# Altium PCB L50T-MAUe.PcbDoc (part 1 of 2)
Units mm, origin at the board's own origin, x right, y up, seen from the top; angles counter-clockwise.
Board outline 170.25 x 235.25 mm, 2 copper layers (Top Layer, Bottom Layer); 116 components, 84 nets, 377 pads, 326 vias.
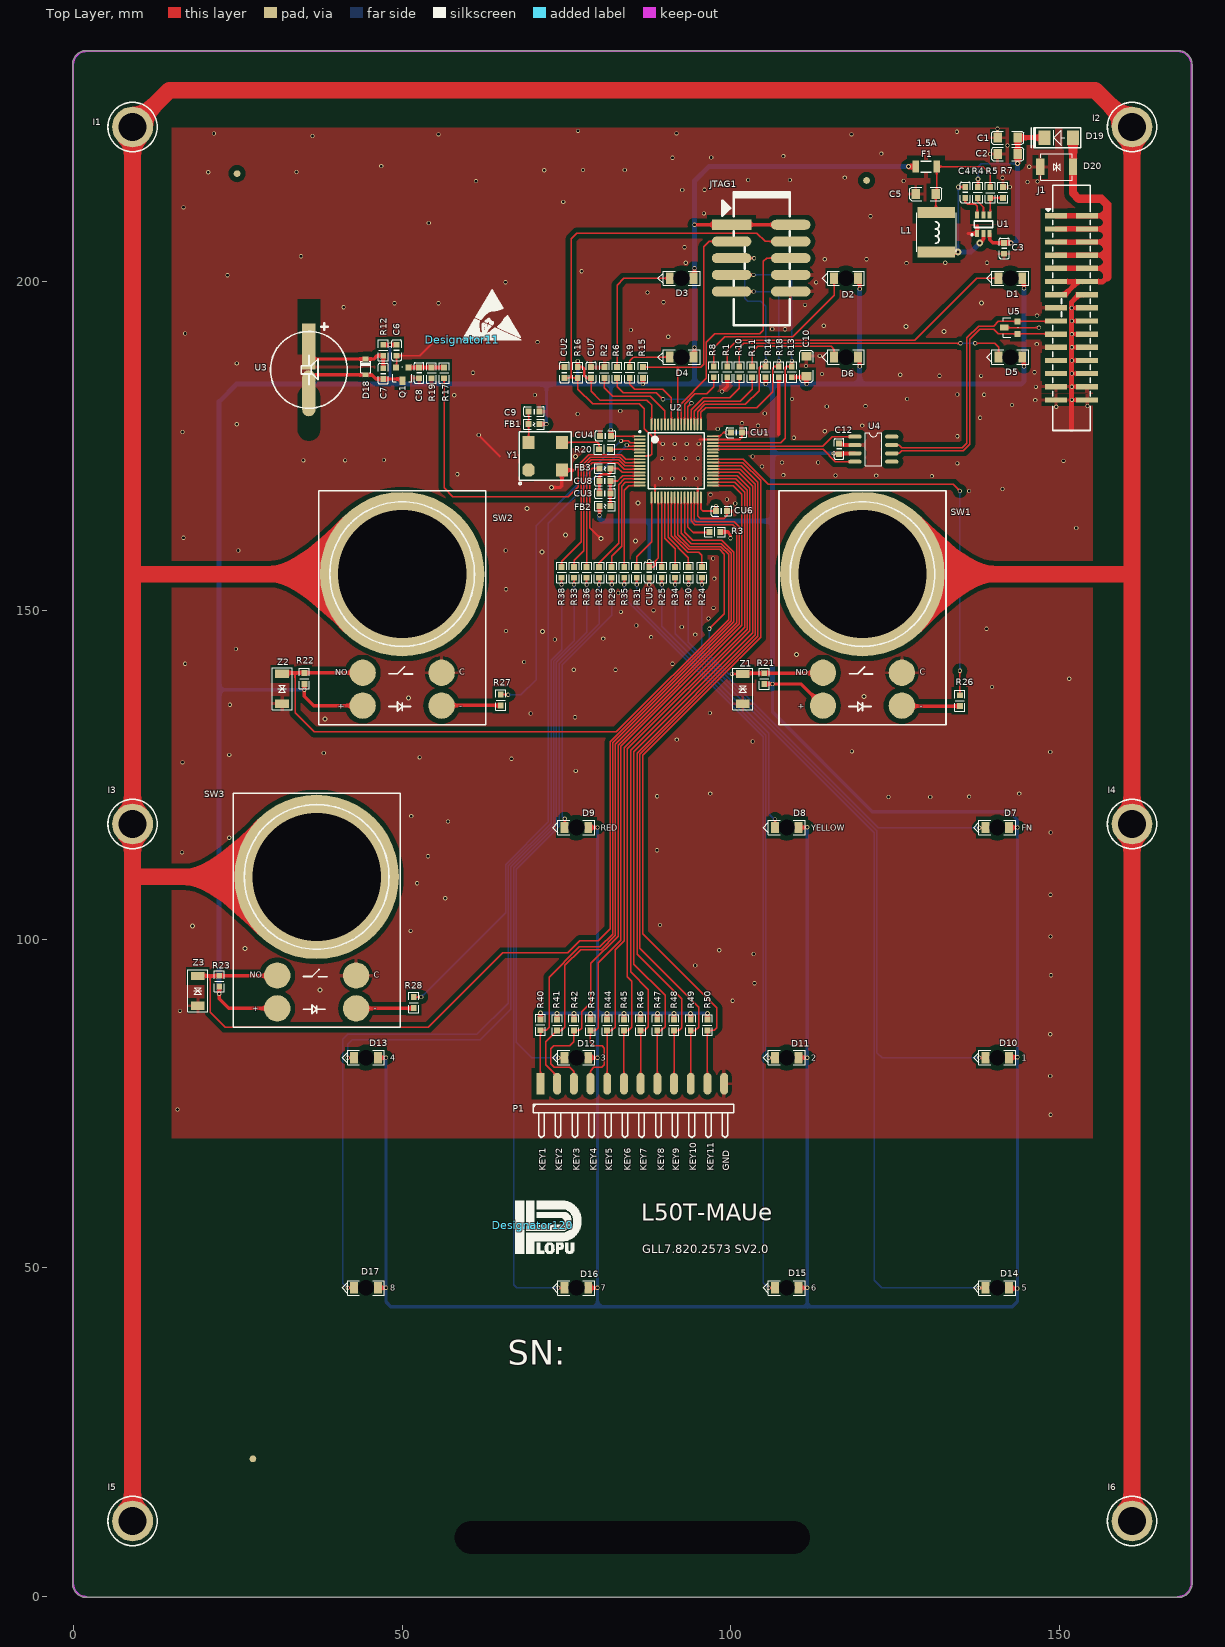
[diagram p0: Top Layer view]
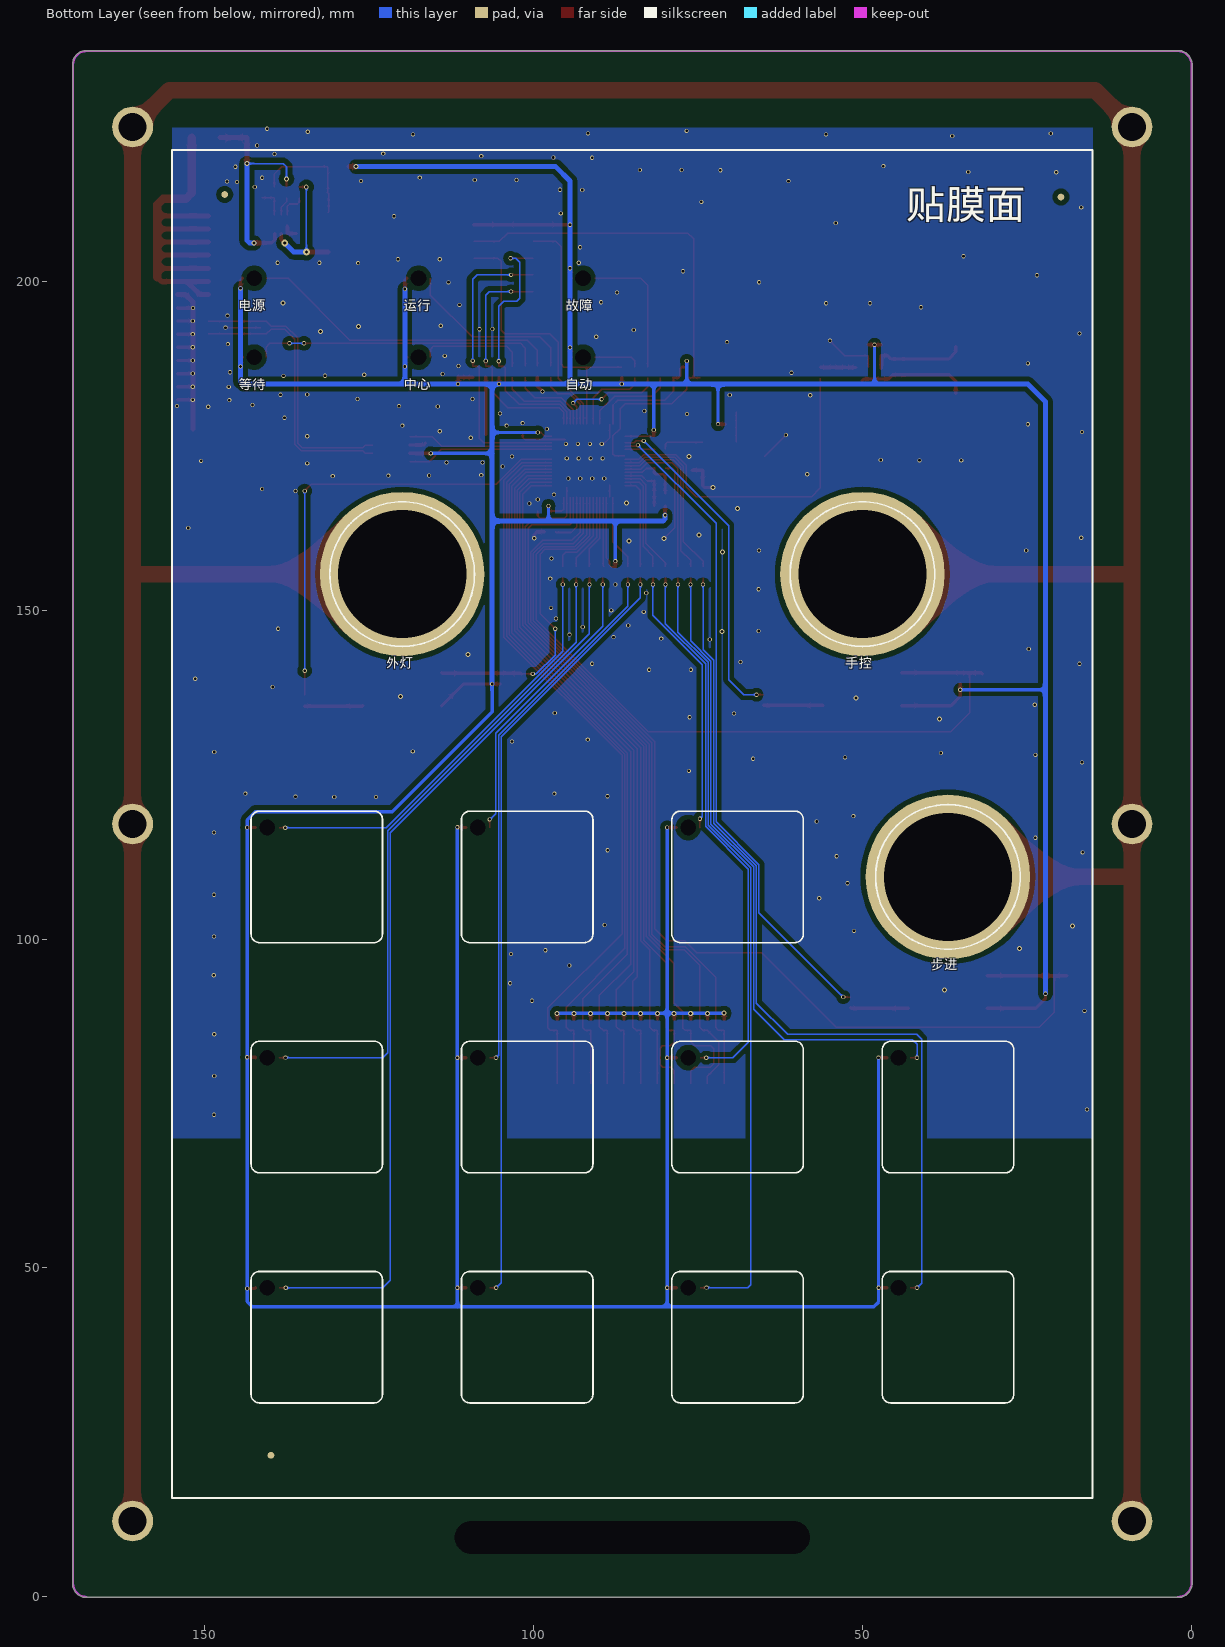
[diagram p1: Bottom Layer view, seen from below]

## Layer stack, top to bottom
Top Solder: solder mask 0.0102, Solder Resist, Dk 3.5
Top Layer: signal copper 0.0356
Dielectric1: dielectric 0.32, FR-4, Dk 4.8
Bottom Layer: signal copper 0.0356
Bottom Solder: solder mask 0.0102, Solder Resist, Dk 3.5

## Board outline
-0.127,2 ccw(c2,2) 2,-0.127 168,-0.127 ccw(c168,2) 170.127,2 170.127,233 ccw(c170,233) 170.127,233.001 cw(c168,233) 170.127,233 cw(c170,233) 170.127,233 170.127,233.001 ccw(c168,233) 168,235.127 2,235.127 ccw(c2,233) -0.127,233

## Design rules (kind name [scope] priority, off if disabled: settings)
Clearance Clearance_poly [InPolygon] p1: gap=0.762
Clearance Clearance_LED [InComponent('D1','D2','D3','D4','D5','D6','D7','D8','D9',10,'D11','D12',13,'D14','D15','D16','D17')] p2: gap=-0.254
Clearance Clearance_U2 [InComponent('U2')] p3: gap=0.178
Clearance Clearance_U3 [InComponent('U3')] p4: gap=0.178
Clearance [All] p5: gap=0.203
ComponentClearance [All] p1: gap=0.152 collisioncheckmode=3 verticalgap=0.152 showdistances=FALSE
DiffPairsRouting [All] p1: maxlimit=0.254 minlimit=0.254 mostfreqgap=0.254 toplayer_minwidth=0.203 toplayer_maxwidth=0.381 toplayer_prefwidth=0.381 bottomlayer_minwidth=0.203 bottomlayer_maxwidth=0.381 bottomlayer_prefwidth=0.381 maxuncoupledlength=12.7
HoleSize [All] p1: absolutevalues=TRUE maxlimit=76.2 minlimit=0.025 maxpercent=80.000 minpercent=20.000
HoleToHoleClearance [All] p1: gap=0.152 allowstackedmicrovias=TRUE
MinimumSolderMaskSliver [All] p1: minsoldermaskwidth=0
PlaneConnect [InNet('V3.3')] p1: planeconnectstyle=Direct reliefexpansion=0.508 reliefentries=4 reliefconductorwidth=0.254 reliefairgap=0.254
PlaneConnect PlaneConnect_DGND [All] p2: planeconnectstyle=Relief reliefexpansion=0.508 reliefentries=4 reliefconductorwidth=0.508 reliefairgap=0.508
PolygonConnect PolygonConnect_via [isvia] p1: connectstyle=Direct reliefconductorwidth=0.254 reliefentries=4 polygonreliefangle="90 Angle" airgapwidth=0.254
PolygonConnect [All] p2: connectstyle=Relief reliefconductorwidth=0.508 reliefentries=4 polygonreliefangle="90 Angle" airgapwidth=0.508
RoutingVias [All] p1: holewidth=0.711 width=1.27 viastyle="Through Hole" minholewidth=0.406 minwidth=0.635 maxholewidth=0.762 maxwidth=1.524
ShortCircuit ShortCircuit_1 [InComponent('D1','D2','D3','D4','D5','D6','D7','D8','D9','D10','D11','D12','D13','D14','D15','D16','D17')] p1: allowed=TRUE
ShortCircuit [All] p2: allowed=FALSE
SilkToSilkClearance [All] p1 off: silktosilkclearance=0
SilkToSolderMaskClearance [IsPad] p1 off: minsilkscreentomaskgap=0 clearancetoexposedcopper=TRUE
SolderMaskExpansion [All] p1: expansion=0.102
UnpouredPolygon [All] p1 off:
Width [All] p1: maxlimit=10.16 minlimit=0.152 preferedwidth=0.254
20 further rules are at their usual default settings.

## Components (designator, comment, footprint, x,y, rotation, side; value= is the part's Value field where it differs from the comment)
C1 "1206-16V-10UF-X5R-K" 1206C#1 140.564,221.869 r0 top
C2 "1206-16V-10UF-X5R-K" 1206C#2 142.088,219.38 r0 top
C3 "0603-50V-0.1UF-X7R-K" 0603C#1 141.554,205.054 r270 top
C4 "0603-50V-0.1UF-X7R-K" 0603C#1 135.636,213.55 r270 top
C5 "1206-10V-47UF-Y5V-M" 1206C#2 129.642,213.335 r0 top
C6 "0603-50V-0.1UF-X7R-K" 0603C#2 49.149,190.373 r270 top
C7 "0603-50V-0.1UF-X7R-K" 0603C#2 47.117,186.817 r270 top
C8 "0603-50V-0.1UF-X7R-K" 0603C#2 52.578,185.293 r90 top
C9 "0603-50V-1NF-X7R-K" 0603c 69.215,180.213 r0 top
C10 "1206-16V-10UF-X5R-K" 1206C#2 111.481,187.122 r270 top
C12 "0603-50V-0.1UF-X7R-K" 0603C#2 116.459,173.736 r90 top
CU1 "0603-50V-0.1UF-X7R-K" 0603C#2 101.674,177.038 r180 top
CU2 "0603-50V-0.1UF-X7R-K" 0603C#2 74.674,186.995 r270 top
CU3 "0603-50V-0.01UF-X7R-K" 0603C#2 81.661,167.767 r180 top
CU4 "0603-50V-0.1UF-X7R-K" 0603C#2 80.084,176.53 r0 top
CU5 "0603-50V-0.1UF-X7R-K" 0603C#2 87.577,154.94 r90 top
CU6 "0603-50V-0.1UF-X7R-K" 0603C#2 99.388,165.1 r180 top
CU7 "0603-50V-0.1UF-X7R-K" 0603C#2 78.738,186.995 r270 top
CU8 "0603-50V-0.1UF-X7R-K" 0603C#2 81.661,169.672 r180 top
D1 "Red" 1206LED-B 142.5,200.5 r0 top locked
D2 "Blue" 1206LED-B 117.5,200.5 r0 top locked
D3 "Green" 1206LED-B 92.5,200.5 r0 top locked
D4 "Red" 1206LED-B 92.5,188.5 r0 top locked
D5 "Blue" 1206LED-B 142.5,188.5 r0 top locked
D6 "Blue" 1206LED-B 117.5,188.5 r0 top locked
D7 "Blue" LED-KEY 140.5,116.96 r180 bottom locked
D8 "Blue" LED-KEY 108.5,116.96 r180 bottom locked
D9 "Blue" LED-KEY 76.5,116.96 r180 bottom locked
D10 "Blue" LED-KEY 140.5,81.96 r180 bottom locked
D11 "Blue" LED-KEY 108.5,81.96 r180 bottom locked
D12 "Blue" LED-KEY 76.5,81.96 r180 bottom locked
D13 "Blue" LED-KEY 44.5,81.96 r180 bottom locked
D14 "Blue" LED-KEY 140.5,46.96 r180 bottom locked
D15 "Blue" LED-KEY 108.5,46.96 r180 bottom locked
D16 "Blue" LED-KEY 76.5,46.96 r180 bottom locked
D17 "Blue" LED-KEY 44.5,46.96 r180 bottom locked
D18 "1N4148" SOD-323 44.45,188.214 r270 top
D19 "SS14" SMA 149.86,221.869 r180 top
D20 "SMBJ15CA" SMB-TVS#1 147.015,217.424 r0 top
Designator11 "Comment" ESD-9 59.106,191.135 r0 top
Designator120 "Comment" LOPU_LOGO 69.875,56.515 r0 top
F1 "贴片1206/nSMD035（台湾陆海）" 1206F 129.692,217.475 r180 top
FB1 "0603 31@100MHz" 0603L 69.215,178.308 r0 top
FB2 "0603 31@100MHz" 0603L 80.01,165.862 r0 top
FB3 "0603 31@100MHz" 0603L 80.01,171.577 r0 top
I1 "PCB-M3" PADS_M3 9,223.5 r0 top locked
I2 "PCB-M3" PADS_M3 161,223.5 r0 top
I3 "PCB-M3" PADS_M3 9,117.5 r0 top locked
I4 "PCB-M3" PADS_M3 161,117.5 r0 top locked
I5 "PCB-M3" PADS_M3 9,11.5 r0 top locked
I6 "PCB-M3" PADS_M3 161,11.5 r0 top locked
J1 "Header15x2_T" IDC-30-2.0T 151.803,196 r0 top locked
JTAG1 "Header 5X2" IDC-10-SMT 104.597,203.556 r0 top
L1 "贴片6045功率电感 3.3uH 5A" L-6045 131.242,207.493 r180 top
P1 "Header 12H" XPHD101-12-A01 85,78 r0 top locked
Q1 "8050" SOT-23 49.073,186.93 r0 top
R1 "0603-680-1%" 0603R#1 99.441,185.445 r90 top
R2 "0603-10K-1%" 0603R#1 80.77,186.995 r270 top
R3 "0603-10K-1%" 0603R#1 98.372,161.925 r180 top
R4 "0603-10K-1%" 0603R#2 137.541,213.55 r90 top
R5 "0603-33.2K-1%" 0603R#1 139.446,214.376 r270 top
R6 "0603-680-1%" 0603R#1 82.677,185.344 r90 top
R7 "0603-10K-1%" 0603R#2 141.351,213.55 r90 top
R8 "0603-680-1%" 0603R#1 97.384,185.445 r90 top
R9 "0603-680-1%" 0603R#1 84.607,185.344 r90 top
R10 "0603-680-1%" 0603R#1 101.27,185.445 r90 top
R11 "0603-680-1%" 0603R#1 103.226,185.42 r90 top
R12 "0603-0-1%" 0603R#1 47.117,188.722 r90 top
R13 "0603-10K-1%" 0603R#1 109.243,187.094 r270 top
R14 "0603-10K-1%" 0603R#1 105.281,187.094 r270 top
R15 "0603-10K-1%" 0603R#1 86.612,186.995 r270 top
R16 "0603-10K-1%" 0603R#1 76.706,185.344 r90 top
R17 "0603-4.7K-1%" 0603R#1 56.388,185.293 r90 top
R18 "0603-10K-1%" 0603R#1 107.278,185.443 r90 top
R19 "0603-3.3K-1%" 0603R#1 54.483,185.293 r90 top
R20 "0603-22-1%" 0603R#1 81.608,174.498 r180 top
R21 "0603-680-1%" 0603R#1 105.078,140.437 r270 top
R22 "0603-680-1%" 0603R#1 35.126,140.462 r270 top
R23 "0603-680-1%" 0603R#1 22.172,94.412 r270 top
R24 "0603-680-1%" 0603R#1 95.578,156.591 r270 top
R25 "0603-680-1%" 0603R#1 89.482,156.591 r270 top
R26 "0603-680-1%" 0603R#1 134.821,137.084 r270 top
R27 "0603-680-1%" 0603R#1 64.996,137.185 r270 top
R28 "0603-680-1%" 0603R#1 51.763,91.186 r270 top
R29 "0603-680-1%" 0603R#1 81.862,156.591 r270 top
R30 "0603-680-1%" 0603R#1 93.546,156.591 r270 top
R31 "0603-680-1%" 0603R#1 85.672,156.591 r270 top
R32 "0603-680-1%" 0603R#1 79.957,156.591 r270 top
R33 "0603-680-1%" 0603R#1 76.147,156.591 r270 top
R34 "0603-680-1%" 0603R#1 91.514,156.591 r270 top
R35 "0603-680-1%" 0603R#1 83.767,156.591 r270 top
R36 "0603-680-1%" 0603R#1 78.052,156.591 r270 top
R38 "0603-680-1%" 0603R#1 74.242,156.591 r270 top
R40 "0603-10K-1%" 0603R#1 71.03,87.782 r270 top
R41 "0603-10K-1%" 0603R#1 73.571,87.757 r270 top
R42 "0603-10K-1%" 0603R#1 76.111,87.757 r270 top
R43 "0603-10K-1%" 0603R#1 78.638,87.757 r270 top
R44 "0603-10K-1%" 0603R#1 81.179,87.757 r270 top
R45 "0603-10K-1%" 0603R#1 83.719,87.757 r270 top
R46 "0603-10K-1%" 0603R#1 86.26,87.757 r270 top
R47 "0603-10K-1%" 0603R#1 88.8,87.757 r270 top
R48 "0603-10K-1%" 0603R#1 91.341,87.757 r270 top
R49 "0603-10K-1%" 0603R#1 93.882,87.757 r270 top
R50 "0603-10K-1%" 0603R#1 96.422,87.757 r270 top
SW1 "SW-DPST" J-19-471 120,155.5 r180 bottom locked
SW2 "SW-DPST" J-19-471 50,155.5 r180 bottom locked
SW3 "SW-DPST" J-19-471 37,109.46 r180 bottom locked
U1 "TPS563200" TSOT23-6 138.405,208.712 r270 top
U2 "STM32F103R8T6" STM-LQFP64_N 91.694,172.72 r0 top
U3 "BUZZER" "BUZZ-.28/.46 -SMT" 35.814,190.119 r270 top locked
U4 "SN65HVD232" SO-8 124.46,176.403 r180 top
U5 "PESD5V0S2BT" SOT-23 143.586,193.954 r270 top
Y1 "HXO-36A8.00000W" XTAL-C 69.215,171.323 r0 top
Z1 "SMBJ5.0CA" SMB-TVS#2 101.801,138.049 r270 top
Z2 "SMBJ5.0CA" SMB-TVS#2 31.748,138.074 r270 top
Z3 "SMBJ5.0CA" SMB-TVS#2 18.921,92.126 r270 top

## Footprints (in the part's own frame and the unit in brackets; to place one, negate y for a bottom-side part, rotate by r counter-clockwise, add the part's x,y. Pads: shape width x height; smd on the part's side, far side on the other; paste and mask are expansions set on the pad)
0603C#1 [mil]
  rect 35x35 smd: 1(-32.5,0) 2(32.5,0)
  silkscreen extent -62,-29 62,30, body extent -31,-16 32,16, height 12
0603C#2 [mil]
  rect 35x35 smd: 1(0,0) 2(65,0)
  silkscreen extent -29,-29 94,30
0603c [mil]
  rect 35x35 smd: 1(0,0) 2(65,0)
  silkscreen extent -29,-29 94,30
0603L [mil]
  rect 35x35 smd: 1(0,0) 2(65,0)
  silkscreen extent -29,-29 94,30
0603R#1 [mil]
  rect 35x35 smd: 1(0,0) 2(65,0)
  silkscreen extent -29,-30 94,29
0603R#2 [mil]
  rect 35x35 smd: 1(-32.5,0) 2(32.5,0)
  silkscreen extent -62,-29 62,30
1206C#1 [mil]
  rect 50x60 smd: 1(0,0) 2(120,0)
  silkscreen extent -35,-40 155,40
1206C#2 [mil]
  rect 50x60 smd: 1(-60,0) 2(60,0)
  silkscreen extent -95,-40 95,40
1206F [mm]
  rect 1x1.85 smd: 1(-1.6,0) 2(1.6,0)
  silkscreen extent -0.8,-0.82 0.8,0.82, body extent -1.75,-0.9 1.75,0.9, height 0.9
1206LED-B [mm]
  round 0 hole 2.4 unplated: 0(0,0)
  rect 1.2x1.7 smd: 1(1.8,0) 2(-1.8,0)
  silkscreen extent -3.61,-1.1 2.8,1.1
"BUZZ-.28/.46 -SMT" [mil]
  rect 275.59x80 smd: 1(0,0)
  oval 275.59x80 smd: 2(280,0)
  silkscreen extent -139,-230 370,230
ESD-9 [mm]
  silkscreen extent 0,0 8.99,7.67
IDC-10-SMT [mm]
  rect 6x1.524 smd: 1(-4.5,5.08)
  oval 6x1.524 smd: 2(4.5,5.08) 3(-4.5,2.54) 4(4.5,2.54) 5(-4.5,0) 6(4.5,0) 7(-4.5,-2.54) 8(4.5,-2.54) 9(-4.5,-5.08) 10(4.5,-5.08)
  silkscreen extent -5.88,-10.21 4.33,10.06
IDC-30-2.0T [mm]
  rect 3.365x0.8 smd: 1(-2.349,14) 2(2.35,14) 3(-2.349,12) 4(2.35,12) 5(-2.349,10) 6(2.35,10) 7(-2.349,8) 8(2.35,8) 9(-2.349,6) 10(2.35,6) 11(-2.349,4) 12(2.35,4) 13(-2.349,2) 14(2.35,2) 15(-2.349,0) 16(2.35,0) 17(-2.349,-2) 18(2.35,-2) 19(-2.349,-4) 20(2.35,-4) 21(-2.349,-6) 22(2.35,-6) 23(-2.349,-8) 24(2.35,-8) 25(-2.349,-10) 26(2.35,-10) 27(-2.349,-12) 28(2.35,-12) 29(-2.349,-14) 30(2.35,-14)
  silkscreen extent -3.91,-18.65 2.85,18.65
J-19-471 [mm]
  round 25 hole 19.5: 0(0,0)
  round 4 smd far side: 1(6,-15) 2(-6,-15) 3(6,-20) 4(-6,-20)
  silkscreen extent -11,-11 11,11
L-6045 [mm]
  rect 5.7x1.7 smd: 1(0,3) 2(0,-3)
  Top Layer pour cut-out: -3,-3 -3,3 3,3 3,-3
  silkscreen extent -3,-3 3,3
LED-KEY [mm] "MAU-LED"
  round 0 hole 2.4 unplated: 0(0,0)
  rect 1.2x1.7 smd far side: 1(-1.8,0) 2(1.8,0)
  silkscreen extent -2.49,-17.51 17.51,2.49
LOPU_LOGO [mm]
  silkscreen extent -2.66,-4.33 7.39,3.7
PADS_M3 [mm]
  round 6.2 hole 4.22: 1(0,0)
  silkscreen extent -3.75,-3.75 3.75,3.75
SMA [mil]
  rect 70x85 smd: 1(-85,0) 2(85,0)
  silkscreen extent -132,-60 165,60
SMB-TVS#1 [mm]
  rect 1.27x2.5 smd: 1(0,0) 2(5,0)
  silkscreen extent 0.1,-2 4.9,2, body extent -0.29,-1.97 5.29,1.98, height 2.6
SMB-TVS#2 [mm] "SMBJ*CA"
  rect 1.27x2.1 smd: 1(-2.261,0) 2(2.261,0)
  silkscreen extent -3.18,-1.52 3.18,1.52
SO-8 [mil]
  oval 80x24 smd: 1(220,0) 2(220,50) 3(220,100) 4(220,150) 5(0,150) 6(0,100) 7(0,50) 8(0,0)
  silkscreen extent 60,-25 160,175
SOD-323 [mil]
  rect 28x36 smd: 1(95,0) 2(0,0)
  silkscreen extent 13,-30 83,30
SOT-23 [mil]
  rect 36x36 smd: 1(75,0) 2(0,0)
  rect 36x50 smd: 3(38,-80)
  silkscreen extent -20,-85 95,5
STM-LQFP64_N [mm] "Thin QFP, 64-Leads, Body 10x10mm, Pitch 0.5mm, IPC Medium Density"
  oval 1.8x0.3 smd: 1(-5.55,3.75) 2(-5.55,3.25) 3(-5.55,2.75) 4(-5.55,2.25) 5(-5.55,1.75) 6(-5.55,1.25) 7(-5.55,0.75) 8(-5.55,0.25) 9(-5.55,-0.25) 10(-5.55,-0.75) 11(-5.55,-1.25) 12(-5.55,-1.75) 13(-5.55,-2.25) 14(-5.55,-2.75) 15(-5.55,-3.25) 16(-5.55,-3.75) 33(5.55,-3.75) 34(5.55,-3.25) 35(5.55,-2.75) 36(5.55,-2.25) 37(5.55,-1.75) 38(5.55,-1.25) 39(5.55,-0.75) 40(5.55,-0.25) 41(5.55,0.25) 42(5.55,0.75) 43(5.55,1.25) 44(5.55,1.75) 45(5.55,2.25) 46(5.55,2.75) 47(5.55,3.25) 48(5.55,3.75)
  oval 0.3x1.8 smd: 17(-3.75,-5.55) 18(-3.25,-5.55) 19(-2.75,-5.55) 20(-2.25,-5.55) 21(-1.75,-5.55) 22(-1.25,-5.55) 23(-0.75,-5.55) 24(-0.25,-5.55) 25(0.25,-5.55) 26(0.75,-5.55) 27(1.25,-5.55) 28(1.75,-5.55) 29(2.25,-5.55) 30(2.75,-5.55) 31(3.25,-5.55) 32(3.75,-5.55) 49(3.75,5.55) 50(3.25,5.55) 51(2.75,5.55) 52(2.25,5.55) 53(1.75,5.55) 54(1.25,5.55) 55(0.75,5.55) 56(0.25,5.55) 57(-0.25,5.55) 58(-0.75,5.55) 59(-1.25,5.55) 60(-1.75,5.55) 61(-2.25,5.55) 62(-2.75,5.55) 63(-3.25,5.55) 64(-3.75,5.55)
  silkscreen extent -5.67,-4.25 4.25,4.57, body extent -5,-5 5,5, height 1.6
TSOT23-6 [mm]
  rect 1.1x0.6 smd: 1(1.4,-0.95) 2(1.4,0) 3(1.4,0.95) 4(-1.4,0.95) 5(-1.4,0) 6(-1.4,-0.95)
  silkscreen extent -0.5,-1.87 1.72,1.4
XPHD101-12-A01 [mm]
  rect 1.2x3.3 smd: 1(-13.97,0)
  oval 1.2x3.3 smd: 2(-11.43,0) 3(-8.89,0) 4(-6.35,0) 5(-3.81,0) 6(-1.27,0) 7(1.27,0) 8(3.81,0) 9(6.35,0) 10(8.89,0) 11(11.43,0) 12(13.97,0)
  silkscreen extent -15.09,-8.23 15.39,-3.15
XTAL-C [mm]
  oct 1.8x2 smd: 1(0,0)
  rect 1.8x2 smd: 2(5.08,0) 3(5.08,4.2) 4(0,4.2)
  silkscreen extent -1.45,-2.21 6.48,5.84

## Part data
C1 C2 C3 C4 C5 C6 C7 C8 C10 C12 CU1 CU2 CU3 CU4 CU5 CU6 CU7 CU8: library part Cap, "Capacitor"
C9: library part CAP, "Capacitor"
D1 D2 D3 D4 D5 D6 D7 D8 D9 D10 D11 D12 D13 D14 D15 D16 D17: library part LED
D18: library part "Diode 1N4148", "High Conductance Fast Diode"
D19: library part DIODE, "Diode"
D20 Z1 Z2 Z3: library part TVSC
F1: library part "Fuse 1", "Fuse"
FB1 FB2 FB3 L1: library part Inductor, "Inductor"
I1 I2 I3 I4 I5 I6: library part PCB-M
J1: library part Header15x2
JTAG1: "Header, 5-Pin, Dual row"
P1: "Header, 12-Pin, Right Angle"
Q1: library part NPN, "NPN Transistor"
R1 R2 R3 R4 R5 R6 R7 R8 R9 R10 R11 R12 R13 R14 R15 R16 R17 R18 R19 R20 R21 R22 R23 R24 R25 R26 R27 R28 R29 R30 R31 R32 R33 R34 R35 R36 R38 R40 R41 R42 R43 R44 R45 R46 R47 R48 R49 R50: library part Res1, "Resistor"
SW1 SW2 SW3: "Double-Pole, Single-Throw Switch"
U1: library part TPS562200
U2: "LQFP64"
U3: "TMB12A03"
U5: library part NUP2105L, "TVS protect"
Y1: library part osc

## Free pads (board coordinates)
  round 1.016 smd far side: 0(19.812,212.852) 0(139.954,21.488) 0(146.99,213.233)
  round 1.016 smd: 0(24.892,216.408) 0(27.305,20.955) 0(120.625,215.367)
  round 0 hole 5 slot 54 at 0 deg: 0(85,9)

## Via types
v1: diameter 0.635, hole 0.406, Top Layer to Bottom Layer, tented both sides, 289 vias
v2: diameter 0.762, hole 0.457, Top Layer to Bottom Layer, tented both sides, 34 vias
v3: diameter 1.016, hole 0.508, Top Layer to Bottom Layer, tented both sides, 2 vias
v4: diameter 0.711, hole 0.406, Top Layer to Bottom Layer, tented both sides, 1 vias

## Nets (pads, with @x,y where several pads share a name; then routed paths per layer and width w, separated by ;. In a path a pad name is that pad's centre, name@x,y a point inside that pad or via, vN(x,y) a via of type N, cw(c..) or ccw(c..) an arc to the next point about the centre after c; other vN are vias at no path point)
AGND: CU3.2 CU8.2 FB3.2 U2.12 | length 9.9
  Top Layer w0.254: FB3.2@81.661,171.577 82.878,171.577 83.485,170.97 U2.12@86.144,170.97
  Top Layer w0.381: CU3.2@80.01,167.767 CU8.2@80.01,169.672 80.01,170.36 80.338,170.688 81.481,170.688 81.661,170.868 FB3.2@81.661,171.577
BEEP: R17.1 U2.8 | length 51.9
  Top Layer w0.203: R17.1@56.388,185.293 56.388,168.603 57.732,167.259 75.258,167.259 76.807,168.808 76.807,172.093 78.4,173.685 83.292,173.685 84.007,172.97 U2.8@86.144,172.97
CAN0_H: J1.17 U4.7 U5.2 | length 42.5
  Top Layer w0.203: U4.7@124.46,175.133 125.578,175.133 125.984,174.727 135.177,174.727 135.888,175.438 135.888,191.413 137.68,193.205 139.939,193.205 140.688,193.954 U5.2@143.586,193.954 149.408,193.954 J1.17@149.454,194
CAN0_L: J1.19 U4.6 U5.1 | length 42.5
  Top Layer w0.203: U4.6@124.46,173.863 125.578,173.863 125.984,174.269 135.366,174.269 136.345,175.248 136.345,191.224 137.869,192.748 139.939,192.748 140.638,192.049 U5.1@143.586,192.049 149.404,192.049 J1.19@149.454,192
CAN_R: U2.44 U4.4 | length 22.4
  Top Layer w0.203: U2.44@97.244,174.47 114.021,174.47 115.898,172.593 U4.4@118.872,172.593
CAN_T: U2.45 U4.1 | length 22.2
  Top Layer w0.203: U2.45@97.244,174.97 113.957,174.97 115.39,176.403 U4.1@118.872,176.403
DGND: C1.1 C2.1 C3.2 C5.1 C6.2 C8.1 C9.2 C10.1 C12.2 CU1.1 CU2.1 CU4.1 CU5.1 CU6.1 CU7.1 D20.1 FB3.1 J1.14 J1.15 J1.16 J1.18 J1.20 J1.21 J1.22 J1.24 J1.26 J1.27 J1.28 J1.29 J1.30 JTAG1.8 JTAG1.10 P1.12 Q1.2 R1.1 R2.1 R3.1 R7.2 R18.1 R19.1 SW1.2 SW2.2 SW3.2 U1.1 U2.18 U2.31 U2.47 U2.63 U4.2 U5.3 Y1.2 Z1.2 Z2.2 Z3.2 | length 118.7
  Top Layer w0.203: Q1.2@49.073,186.93 49.149,187.006 C6.2@49.149,188.722 52.654,188.722 v1(54.94,191.008) ; v1(61.646,176.657) 64.948,173.355 ; FB3.1@80.01,171.577 78.941,171.577 78.56,171.196 78.56,162.56 v2(80.211,160.909)
  Top Layer w0.254: U2.18@88.444,167.17 88.444,169.117 ; U2.63@88.444,178.27 88.444,176.203 89.336,175.311 v1(89.637,175.311) ; 94.944,168.733 U2.31@94.944,167.17 94.944,164.337 95.324,163.957 99.007,163.957 99.388,164.338 CU6.1@99.388,165.1 ; 95.198,175.97 U2.47@97.244,175.97 101.368,175.97 101.674,176.276 CU1.1@101.674,177.038 ; U5.3@141.554,192.989 v1(146.863,192.989)
  Top Layer w0.508: v2(72.743,168.681) 74.064,168.681 74.295,168.912 Y1.2@74.295,171.323 75.925,171.323 ; R3.1@98.372,161.925 99.517,161.925 99.924,161.519 v1(99.924,160.96) ; v1(98.654,183.286) 99.441,184.074 R1.1@99.441,185.445 ; 107.278,176.798 R18.1@107.278,185.443 ; C12.2@116.459,175.387 116.713,175.133 U4.2@118.872,175.133 ; 136.071,207.312 U1.1@137.455,207.312 137.455,208.431 137.439,208.446 ; v1(151.816,195.961) 154.114,195.961 J1.16@154.153,196 ; v1(151.854,182) J1.30@154.153,182 ; v1(151.854,184) J1.28@154.153,184 ; v1(151.854,186) J1.26@154.153,186 ; v1(151.854,188) J1.24@154.153,188 ; v1(151.854,190) J1.22@154.153,190 ; v1(151.854,192) J1.20@154.153,192 ; v1(151.854,194) J1.18@154.153,194
  Top Layer w0.762: 151.816,177.571 v1(151.816,195.961) 151.816,196.875 152.94,198 J1.14@154.153,198
  other v1: 148.615,73.279 15.845,74.092 148.565,79.174 148.565,85.524 16.226,89.078 100.254,90.627 103.579,93.269 148.664,94.488 94.564,95.987 103.452,97.739 98.222,98.298 148.613,100.383 51.283,101.244 89.205,102.133 56.566,106.197 148.613,106.733 52.271,108.483 53.922,112.598 16.51,113.182 88.748,113.513 23.696,115.418 148.615,116.205 56.97,117.881 51.382,118.694 123.975,121.615 130.325,121.615 136.22,121.666 88.773,121.717 96.848,122.123 143.838,122.123 76.401,125.578 16.607,126.873 66.622,127.432 52.652,127.635 23.696,128.016 38.075,128.295 148.565,128.45 118.389,128.549 103.302,130.048 91.77,130.327 76.276,133.731 69.543,134.315 96.797,134.368 23.8,135.636 139.698,138.326 151.458,139.598 76.094,140.97 82.444,140.97 16.988,141.859 91.11,141.859 68.555,142.138 24.712,144.12 73.228,145.567 80.592,145.694 87.859,145.923 94.562,146.304 65.784,146.861 138.862,147.193 92.532,147.447 85.623,147.701 96.596,148.742 83.259,149.758 88.212,149.987 97.356,150.368 82.878,152.629 65.784,153.211 87.577,153.924 97.483,154.813 97.293,157.886 25.093,159.106 65.733,159.106 16.734,161.036 152.527,162.509 100.658,166.243 99.388,166.853 96.901,167.589 136.22,168.148 141.298,168.453 89.264,170.053 91.084,170.053 92.905,170.053 94.725,170.053 130.556,170.409 122.098,170.485 115.9,170.51 107.975,170.561 58.395,170.688 104.724,171.856 134.44,172.339 107.77,172.466 113.259,172.466 150.569,172.72 34.974,172.796 41.324,172.796 47.219,172.847 89.518,173.101 91.338,173.101 93.159,173.101 94.979,173.101 103.302,173.38 91.457,175.311 93.277,175.311 95.098,175.311 109.576,176.251 134.442,176.477 16.607,177.114 114.275,177.241 97.991,177.571 104.115,178.079 119.964,178.079 24.839,178.283 101.676,178.46 137.897,179.271 76.683,179.857 105.131,179.934 83.16,180.315 149.479,180.95 114.575,181 120.47,181.051 154.229,181.066 142.748,181.229 146.279,181.966 109.296,182.143 126.797,182.143 57.935,182.702 70.18,182.753 138.506,182.778 134.442,182.827 146.38,183.972 138.049,185.649 131.724,185.674 125.755,185.826 113.843,185.928 60.78,186.131 146.177,186.207 111.43,187.147 24.839,187.554 113.513,188.697 146.507,190.475 70.587,190.779 90.475,191.592 16.988,192.1 84.785,192.634 108.229,192.735 106.274,192.786 114.122,193.269 146.558,194.818 41.095,196.088 111.277,196.444 48.842,196.698 55.524,196.698 89.736,196.85 87.323,198.323 112.954,199.873 65.71,199.898 23.442,200.965 77.292,201.574 126.693,202.794 93.142,202.844 132.588,202.844 138.938,202.844 114.277,203.378 120.627,203.378 34.62,203.835 92.939,205.207 54.049,208.89 121.232,209.931 95.885,210.363 16.734,211.277 74.496,212.115 92.608,213.919 95.987,213.97 142.41,214.376 145.108,215.138 146.632,215.214 61.239,215.265 126.263,215.29 102.616,215.443 108.966,215.443 141.3,215.773 117.323,215.798 20.521,216.611 33.92,216.662 71.603,216.916 77.498,216.967 83.848,216.967 145.364,217.449 46.812,217.551 91.11,218.821 97.005,218.872 107.975,219.075 139.421,219.405 122.883,219.456 142.06,220.675 36.354,222.123 55.531,222.377 118.339,222.377 21.368,222.504 91.726,222.529 134.366,222.783 76.74,222.91 140.536,223.246
  other v2: 37.49,92.253 26.137,98.603 18.085,101.956 38.278,133.477 50.952,136.677 120.269,136.906 109.957,143.281 71.321,146.761 71.27,158.877 85.494,160.503 74.852,161.442 68.984,165.456 85.85,166.345 76.35,173.406 132.436,192.405 126.644,193.167 138.125,196.698
JTCK: JTAG1.9 R18.2 U2.49 | length 37
  Top Layer w0.203: U2.49@95.444,178.27 95.444,180.131 96.136,180.823 103.937,180.823 106.324,183.21 106.324,186.817 106.601,187.094 R18.2@107.278,187.094 107.278,187.897 v1(107.29,187.909) ; JTAG1.9@100.097,198.476 v1(103.454,198.476)
  Bottom Layer w0.203: v1(103.454,198.476) 106.756,198.476 107.29,197.942 v1(107.29,187.909)
JTDI: JTAG1.5 R14.1 U2.50 | length 40.6
  Top Layer w0.203: U2.50@94.944,178.27 94.944,180.205 96.044,181.305 102.184,181.305 104.292,183.413 104.292,186.868 104.519,187.094 R14.1@105.281,187.094 105.281,187.856 v1(105.308,187.884) ; JTAG1.5@100.097,203.556 103.505,203.556 v1(103.53,203.53)
  Bottom Layer w0.203: v1(103.53,203.53) 102.743,203.53 102.133,202.921 102.133,197.46 102.565,197.028 104.546,197.028 105.308,196.266 v1(105.308,187.884)
JTDO: JTAG1.6 U2.55 | length 38.3
  Top Layer w0.203: U2.55@92.444,178.27 92.444,181.446 96.266,185.268 96.266,190.729 97.561,192.024 104.419,192.024 104.953,192.557 104.953,203.048 105.461,203.556 JTAG1.6@109.097,203.556
JTMS: JTAG1.7 R13.1 U2.46 | length 45.8
  Top Layer w0.203: U2.46@97.251,175.463 U2.46@97.244,175.47 107.576,175.47 108.255,176.149 108.255,186.919 108.43,187.094 R13.1@109.243,187.094 109.243,187.907 v1(109.271,187.935) ; JTAG1.7@100.097,201.016 v1(103.429,201.016)
  Bottom Layer w0.203: v1(103.429,201.016) 108.585,201.016 109.271,200.33 v1(109.271,187.935)
JTRST: JTAG1.3 R15.1 U2.56 | length 41.9
  Top Layer w0.203: R15.1@86.612,186.995 91.491,186.995 ; U2.56@91.944,178.27 91.944,186.588 ; 92.354,186.995 ccw(c92.352,186.586) 92.35,186.995 ; JTAG1.3@100.097,206.096 96.672,206.096 95.834,205.257 95.834,187.401 95.428,186.995 92.35,186.995 ; 91.491,186.995 cw(c91.514,186.565) 91.538,186.995 ; 91.491,186.995 91.538,186.995 ; 91.538,186.995 cw(c91.514,186.565) 91.944,186.588 ; 91.538,186.995 91.944,186.995 ; 91.944,186.588 cw(c92.352,186.586) 92.35,186.995 ; 91.944,186.588 91.944,186.995 ; 91.944,186.995 92.35,186.995
KEY1: P1.1 R40.2 U2.27 | length 109.4
  Top Layer w0.203: P1.1@71.042,78.012 P1.1@71.03,78 R40.2@71.03,86.131 71.905,86.131 72.337,86.563 72.337,94.183 76.96,98.806 80.084,98.806 82.029,100.751 82.029,129.834 100.455,148.26 100.455,158.826 98.626,160.655 94.181,160.655 92.944,161.892 U2.27@92.944,167.17
KEY2: P1.2 R41.2 U2.29 | length 110.4
  Top Layer w0.203: P1.2@73.57,78 73.57,79.135 71.831,80.874 71.831,84.367 R41.2@73.571,86.106 74.267,86.106 74.75,86.589 74.75,96.021 77.128,98.4 80.252,98.4 82.435,100.583 82.435,129.666 100.861,148.091 100.861,162.484 100.302,163.043 94.53,163.043 93.989,163.583 93.989,167.125 U2.29@93.944,167.17
KEY3: P1.3 R42.2 U2.30 | length 112
  Top Layer w0.203: P1.3@76.11,78 76.11,79.871 75.489,80.493 73.152,80.493 72.619,81.026 72.619,83.337 73.05,83.769 75.489,83.769 76.111,84.391 R42.2@76.111,86.106 76.96,86.106 77.292,86.438 77.292,88.925 78.715,90.348 78.715,96.287 82.842,100.414 82.842,129.497 101.268,147.923 101.268,162.712 100.531,163.449 94.698,163.449 94.444,163.703 U2.30@94.444,167.17
KEY4: P1.4 R43.2 U2.33 | length 107.8
  Top Layer w0.203: P1.4@78.65,78 78.65,79.996 79.172,80.518 80.391,80.518 80.772,80.899 80.772,83.388 80.416,83.744 79.223,83.744 78.638,84.328 R43.2@78.638,86.106 79.449,86.106 79.83,86.487 79.83,96.416 83.248,99.834 83.248,129.329 101.674,147.755 101.674,167.64 100.344,168.97 U2.33@97.244,168.97
KEY5: P1.5 R44.2 U2.34 | length 104.5
  Top Layer w0.203: P1.5@81.19,78 81.179,78.011 R44.2@81.179,86.106 81.862,86.106 82.37,86.614 82.37,98.381 83.748,99.76 83.748,129.122 102.08,147.454 102.08,167.941 100.551,169.47 U2.34@97.244,169.47
KEY6: P1.6 R45.2 U2.35 | length 104.9
  Top Layer w0.203: P1.6@83.73,78 83.73,86.095 R45.2@83.719,86.106 84.427,86.106 84.91,86.589 84.91,93.599 84.248,94.261 84.248,128.915 102.487,147.153 102.487,168.241 100.758,169.97 U2.35@97.244,169.97
KEY7: P1.7 R46.2 U2.36 | length 106.5
  Top Layer w0.203: P1.7@86.27,78 86.27,86.096 R46.2@86.26,86.106 86.866,86.106 87.45,86.69 87.45,92.329 84.748,95.031 84.748,128.708 102.893,146.853 102.893,168.542 100.965,170.47 U2.36@97.244,170.47
KEY8: P1.8 R47.2 U2.37 | length 108.1
  Top Layer w0.203: P1.8@88.81,78 88.81,86.096 R47.2@88.8,86.106 89.406,86.106 89.99,86.69 89.99,91.44 85.248,96.182 85.248,128.501 103.3,146.552 103.3,168.843 101.172,170.97 U2.37@97.244,170.97
KEY9: P1.9 R48.2 U2.38 | length 109.8
  Top Layer w0.203: P1.9@91.35,78 91.35,86.097 R48.2@91.341,86.106 92.149,86.106 92.53,86.487 92.53,90.932 85.748,97.714 85.748,128.293 103.706,146.251 103.706,169.144 101.38,171.47 U2.38@97.244,171.47
KEY10: P1.10 R49.2 U2.39 | length 111.4
  Top Layer w0.203: P1.10@93.89,78 93.89,86.098 R49.2@93.882,86.106 94.587,86.106 95.07,86.589 95.07,89.662 86.155,98.577 86.155,128.125 104.112,146.083 104.112,169.444 101.587,171.97 U2.39@97.244,171.97
KEY11: P1.11 R50.2 U2.40 | length 113.5
  Top Layer w0.203: P1.11@96.43,78 96.43,86.098 R50.2@96.422,86.106 97.483,86.106 97.864,86.487 97.864,89.535 86.561,100.838 86.561,127.957 104.519,145.915 104.519,169.745 101.794,172.47 U2.40@97.244,172.47
LED_AUTO: R10.1 U2.52 | length 12.6
  Top Layer w0.203: U2.52@93.944,178.27 93.944,180.482 95.809,182.347 99.822,182.347 101.27,183.794 R10.1@101.27,185.445
LED_CENTER: R11.1 U2.51 | length 14
  Top Layer w0.203: U2.51@94.444,178.27 94.444,180.28 95.977,181.813 101.422,181.813 103.226,183.617 R11.1@103.226,185.42
LED_ERR: R6.1 U2.53 | length 17.2
  Top Layer w0.203: R6.1@82.677,185.344 82.677,184.023 83.591,183.109 88.646,183.109 v1(89.662,182.093) ; U2.53@93.444,178.27 93.444,180.947 v1(94.005,181.508)
  Bottom Layer w0.203: v1(89.662,182.093) 93.421,182.093 v1(94.005,181.508)
LED_LOCK: R9.1 U2.58 | length 12.2
  Top Layer w0.203: R9.1@84.607,185.344 84.607,184.379 85.369,183.617 89.662,183.617 90.944,182.335 U2.58@90.944,178.27
LED_RUN: R8.1 U2.54 | length 10.1
  Top Layer w0.203: U2.54@92.944,178.27 92.944,181.371 94.504,182.931 96.317,182.931 97.384,183.998 R8.1@97.384,185.445
LED_SW1: R28.1 U2.4 | length 100.1
  Top Layer w0.203: R28.1@51.763,91.186 v1(52.906,91.186) ; v1(84.148,175.133) 84.311,174.97 U2.4@86.144,174.97
  Bottom Layer w0.203: v1(52.906,91.186) 65.733,104.013 65.733,111.316 72.235,117.818 72.235,163.22 v1(84.148,175.133)
LED_SW2: R27.1 U2.3 | length 51
  Top Layer w0.203: R27.1@64.996,137.185 66.089,137.185 v1(66.114,137.16) ; v1(83.259,175.768) 83.272,175.755 84.406,175.755 84.691,175.47 U2.3@86.144,175.47
  Bottom Layer w0.203: v1(66.114,137.16) 68.044,137.16 70.356,139.471 70.356,162.865 v1(83.259,175.768)
LED_SW3: R26.1 U2.41 | length 70.6
  Top Layer w0.203: U2.41@97.244,172.97 101.904,172.97 105.71,169.164 133.805,169.164 v1(134.821,168.148) ; R26.1@134.821,137.084 v1@134.821,140.818
  Bottom Layer w0.203: v1(134.821,168.148) 134.821,140.82 v1(134.823,140.818)